# EAGLE board arduinoboardfinaldraft (EAGLE 8.3.2)
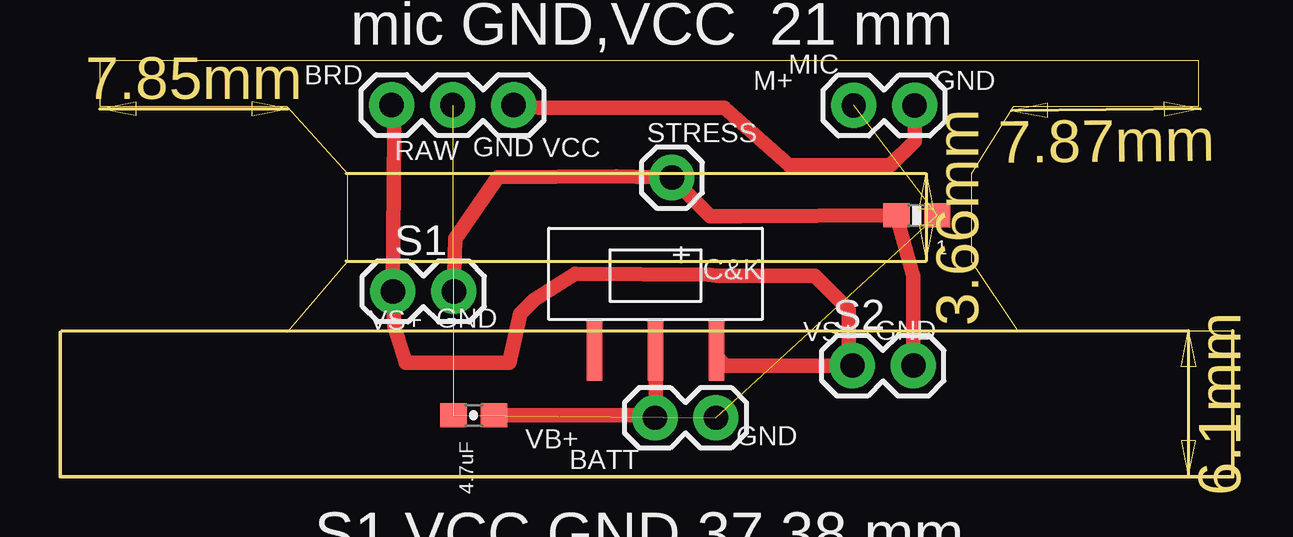
[diagram p0: board, top side]

Size 48.87 x 17.37 mm. Coordinates in mm from the lower left corner, seen from the top.
Outline: 1.78,17.37 47.42,17.37 47.42,15.42 39.73,15.42 37.97,12.62 37.97,8.99 39.9,6.1 48.87,6.1 48.87,0 0,0 0,6.02
Outline: 9.47,6.02 11.99,8.99 11.99,12.62 9.47,15.42 1.68,15.42 1.68,17.37
Copper layers (1*16): Top 0.035mm / dielectric 1.5mm / Bottom 0.035mm
Design rules "SparkFun *": minimum track width 8mil, minimum drill 20mil, track to track 15mil, track to pad 15mil, pad to pad 8mil, via to via 8mil, smd to smd 8mil, copper to edge 0mil, drill to drill 16mil, minimum pad ring 12mil, minimum via ring 10mil, stop-mask expansion 4mil, vias tented up to drill 20mil, thermal gap 10mil

## Footprints (pad centres in the part's own frame; a part is rotated, then mirrored left to right if it is on the bottom)
1X02 = drill 1.016 pad 1.88: 1 0,0; 2 2.54,0
1X03 = drill 1.016 pad 1.88: 1 0,0; 2 2.54,0; 3 5.08,0
0603-CAP = smd 1.1 x 1: 1 -0.85,0; 2 0.85,0
0603-RES = smd 1.1 x 1: 1 -0.85,0; 2 0.85,0
1X01 = drill 1.016 pad 1.88: 1 0,0
WILL-BLACKSLIDESWITCH = smd 2.54 x 0.635: CONN 5.08,6.985; NC 5.08,1.905; V+ 5.08,4.445

## Placement (x,y rotation side)
BATT  [1X02]  24.79,2.47 0 top
BRD  [1X03]  18.9,15.5 180 top
C2  4.7uF  [0603-CAP]  17.24,2.57 180 top
MIC  [1X02]  35.61,15.48 180 top
R1  1  [0603-RES]  35.7,10.9 180 top
S1  S1  [1X02]  16.41,7.73 180 top
S2  [1X02]  35.56,4.64 180 top
STRESS  [1X01]  25.49,12.48 0 top
U$1  WILL-BLACKSLIDESWITCH  [WILL-BLACKSLIDESWITCH]  20.37,10.36 270 top

## Library data of the parts
BATT BRD MIC S1 S2 STRESS = SparkFun-Connectors
C2 = SparkFun-Capacitors; PROD_ID: CAP-08280
R1 = SparkFun-Resistors; PROD_ID: RES-08296
U$1 = Will-Switch

## Nets
GND: BATT.2 BRD.2 C2.2 MIC.2 R1.1
SERVOGND: R1.2 S1.1 S2.1 STRESS.1
SWITCH+: BATT.1 C2.1 U$1.V+
V_BATT: BRD.3 S1.2 S2.2 U$1.CONN
VCC: BRD.1 MIC.1

## Tracks (layer width: path | path; a pad name or v marks a point on that pad's centre or on a via)
GND  (4 unrouted)
SERVOGND
  Top 0.61: S1.1 16.46,9.93 18.24,12.5 23.18,12.52 STRESS.1 27.1,10.87 28.32,10.87 R1.2 35.56,8.36 S2.1
SWITCH+
  Top 0.61: U$1.V+ 24.81,2.62 BATT.1 24.28,2.56 C2.1
V_BATT
  Top 0.508: 27.56,4.65 27.31,4.65 27.33,5.03 U$1.CONN
  Top 0.61: BRD.3 13.92,14.46 S1.2 13.92,6.27 14.4,4.75 18.72,4.75 19.18,6.81 19.76,7.39 21.46,8.46 27.03,8.43 27.36,8.38 31.45,8.38 32.87,6.96 32.87,4.79 S2.2 27.72,4.64 27.33,5.03
VCC
  Top 0.61: MIC.1 35.61,14 34.6,12.98 30.38,12.98 27.69,15.39 19.94,15.39 BRD.1

## Text on the board
tPlace: RAW,GND,VCC 26 mm | battery 45 mm | stress 28 mm A7 | mic 16 mm A6 | mic GND,VCC 21 mm | M+ | GND | RAW | GND | VCC | + | VS+ | GND | VS+ | GND | VB+ | GND | S1 VCC,GND 37,38 mm | S2 VCC,GND 37,38 mm | S1 SIG,48 mm D5 | S1 SIG,52 mm D6